# Altium PCB pcb3.pcbdoc
Units mil, origin at the board's own origin, x right, y up, seen from the top; angles counter-clockwise.
Board outline 3315 x 3159.89 mil, 2 copper layers (Top Layer, Bottom Layer); 16 components, 37 nets, 77 pads, 4 vias.
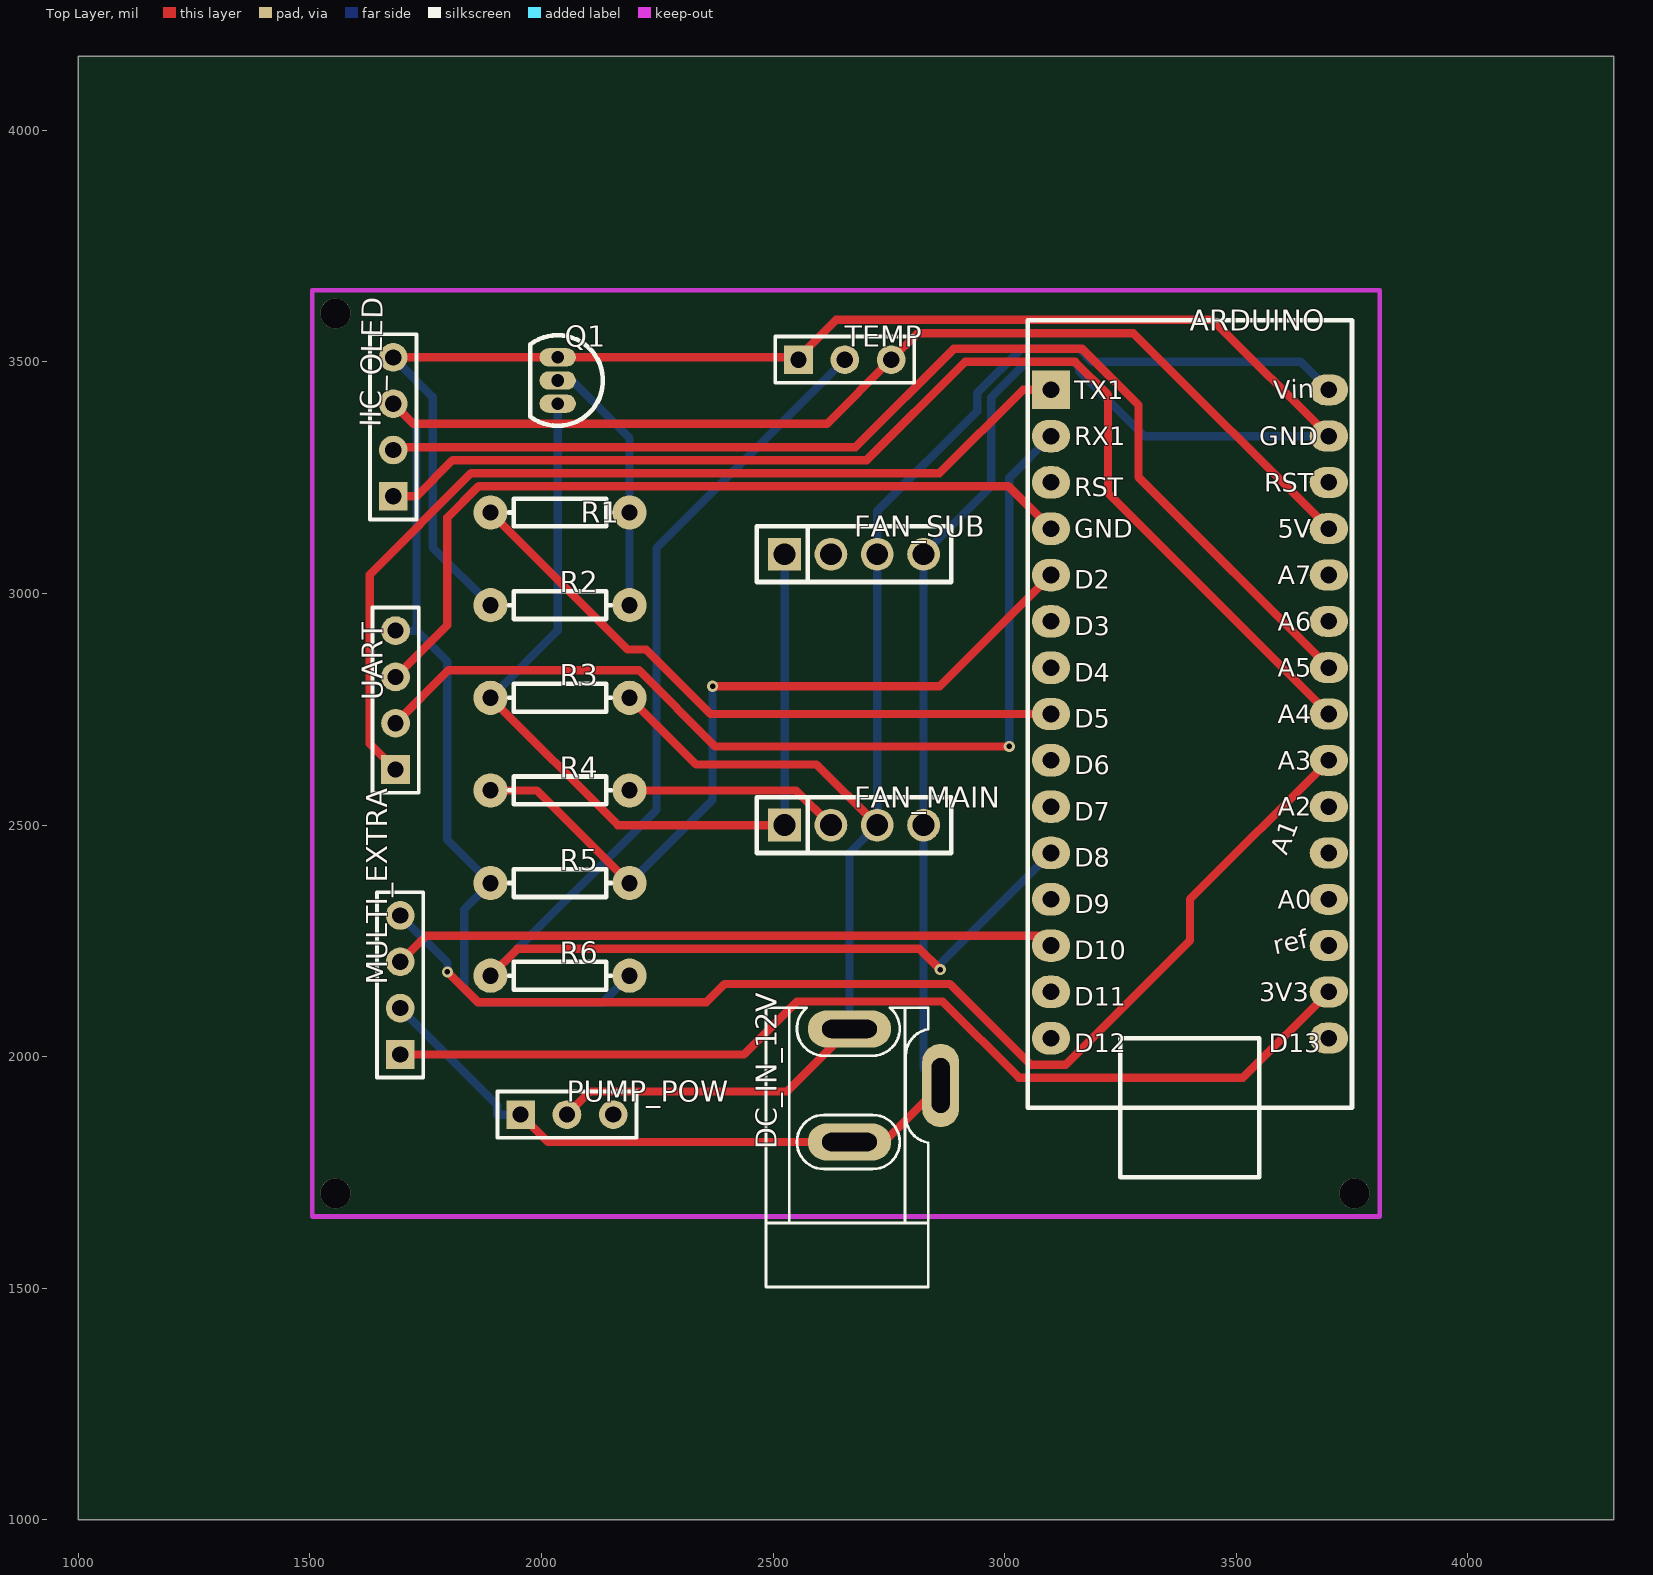
[diagram p0: Top Layer view]
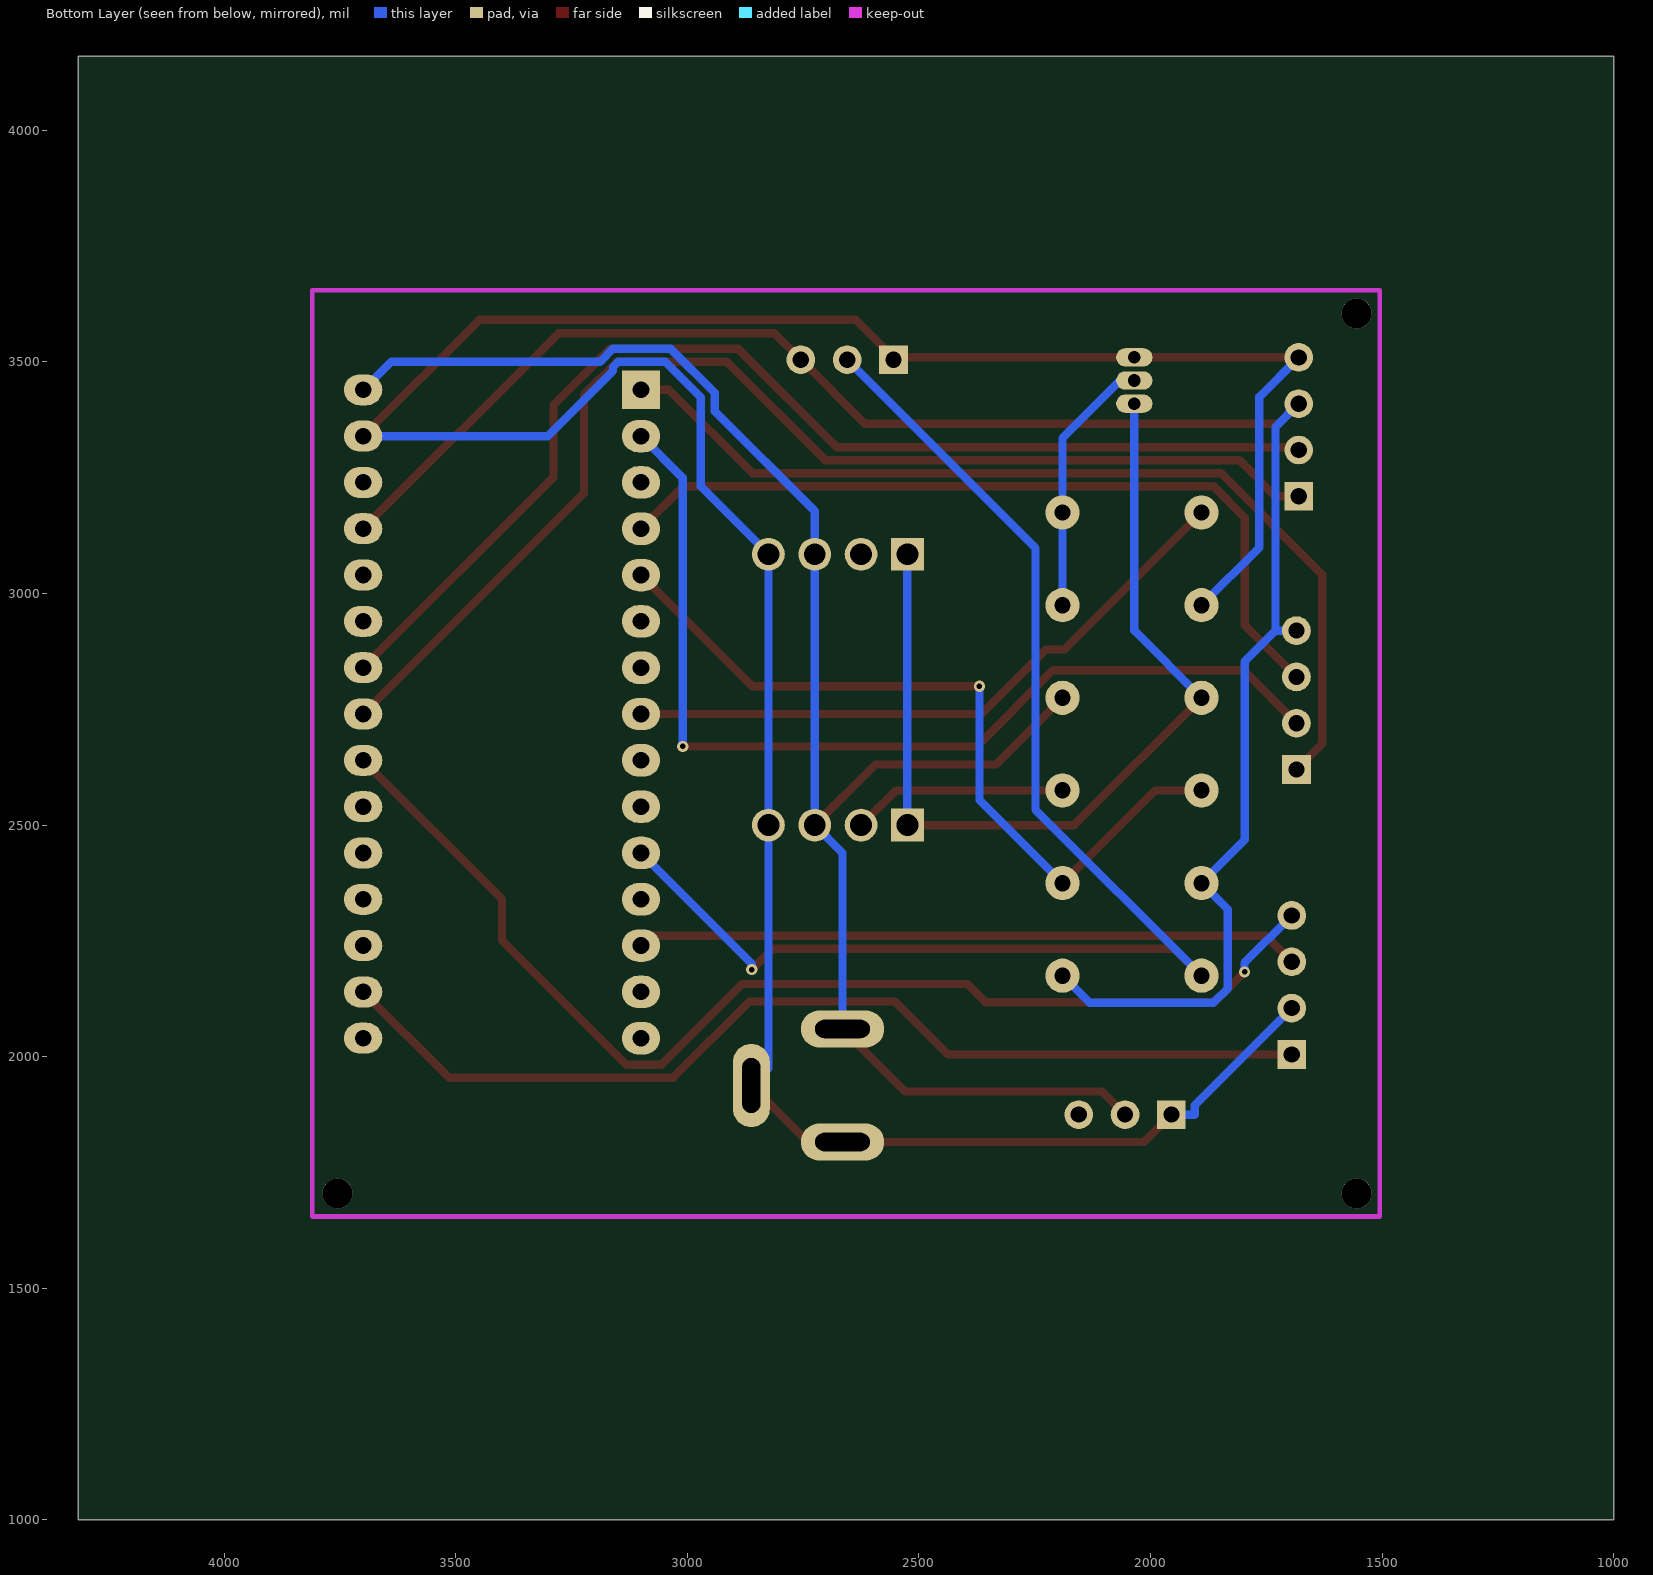
[diagram p1: Bottom Layer view, seen from below]

## Layer stack, top to bottom
Top Layer: signal copper (thickness not stored)
Dielectric: dielectric 12.6, FR-4, Dk 4.8
Bottom Layer: signal copper (thickness not stored)

## Board outline
4315,1000 1000,1000 1000,4159.89 4315,4159.89

## Components (designator, comment, footprint, x,y, rotation, side; value= is the part's Value field where it differs from the comment)
ARDUINO "ArduinoNano" "ARDUINO NANO VINCENT" 3400,2739.89 r0 top
DC_IN_12V "DC005" DC005 2665,2059.89 r90 top
FAN_MAIN "风扇2" DIP-1X4P-2.54MM-M 2675,2499.89 r0 top
FAN_SUB "风扇1" DIP-1X4P-2.54MM-M 2675,3084.89 r0 top
IIC_OLED "Header-Male-2.54_1x4_IIC" HDR-TH_4P-P2.54-V 1680,3359.89 r90 top
MULTI_EXTRA "Header-Male-2.54_1x4_EXTRA" HDR-TH_4P-P2.54-V 1695,2154.89 r90 top
PUMP_POW "Header-Male-2.54_1x3" HDR-TH_3P-P2.54-V 2055,1874.89 r0 top
Q1 "9013H" TO-92(TO-92-3) 2035,3459.89 r0 top
R1 "10k" AXIAL-0.3 2040,3174.89 r0 top
R2 "10k" AXIAL-0.3 2040,2974.89 r0 top
R3 "2.2k" AXIAL-0.3 2040,2774.89 r0 top
R4 "100Ω" AXIAL-0.3 2040,2574.89 r0 top
R5 "2k" AXIAL-0.3 2040,2374.89 r0 top
R6 "4.7k" AXIAL-0.3 2040,2174.89 r0 top
TEMP "Header-Male-2.54_1x3_TEMP" HDR-TH_3P-P2.54-V 2655,3504.89 r0 top
UART "Header-Male-2.54_1x4_UART" HDR-TH_4P-P2.54-V 1685,2769.89 r90 top

## Footprints (in the part's own frame and the unit in brackets; to place one, negate y for a bottom-side part, rotate by r counter-clockwise, add the part's x,y. Pads: shape width x height; smd on the part's side, far side on the other; paste and mask are expansions set on the pad)
"ARDUINO NANO VINCENT" [mil]
  rect 82.68x82.68 hole 36: 1(-300,700)
  oval 82.65x70 hole 36: 2(-300,600) 3(-300,500) 4(-300,400) 5(-300,300) 6(-300,200) 7(-300,100) 8(-300,0) 9(-300,-100) 10(-300,-200) 11(-300,-300) 12(-300,-400) 13(-300,-500) 14(-300,-600) 15(-300,-700)
  oval 82.65x66.93 hole 36: 16(300,-700) 17(300,-600) 18(300,-500) 19(300,-400) 20(300,-300) 21(300,-200) 22(300,-100) 23(300,0) 24(300,100) 25(300,200) 26(300,300) 27(300,400) 28(300,500) 29(300,600) 30(300,700)
  silkscreen extent -350,-1000 350,850
AXIAL-0.3 [mil]
  round 74 hole 35.4: 1(-150,0) 2(150,0)
  silkscreen extent -110,-30 110,30
DC005 [mil]
  oval 80x179.98 hole 39.38 slot 118.11 at 90 deg: 1(0,0) 2(-244.09,0)
  oval 179.98x80 hole 39.38 slot 118.11 at 0 deg: 3(-122.05,-196.85)
  silkscreen extent -557,-170 46,180
DIP-1X4P-2.54MM-M [mm]
  rect 1.8x1.8 hole 1.2: 1(-3.81,0)
  round 1.8 hole 1.2: 2(-1.27,0) 3(1.27,0) 4(3.81,0)
  silkscreen extent -5.33,-1.52 5.33,1.52
HDR-TH_3P-P2.54-V [mil]
  rect 62x62 hole 35: 1(-100,0)
  round 62 hole 35: 2(0,0) 3(100,0)
  silkscreen extent -150,-50 150,50
HDR-TH_4P-P2.54-V [mil]
  rect 62x62 hole 35: 1(-150,0)
  round 62 hole 35: 2(-50,0) 3(50,0) 4(150,0)
  silkscreen extent -200,-50 200,50
TO-92(TO-92-3) [mm]
  oval 1.999x1 hole 0.7: 1(0,1.27) 2(0,0) 3(0,-1.27)
  silkscreen extent -1.5,-2.48 2.48,2.48

## Free pads (board coordinates)
  round 65 hole 65 unplated: ""(1555,1704.89) ""(1555,3604.89) ""(3755,1704.89)

## Via types
v1: diameter 24, hole 12, Top Layer to Bottom Layer, 4 vias

## Nets (pads, with @x,y where several pads share a name; then routed paths per layer and width w, separated by ;. In a path a pad name is that pad's centre, name@x,y a point inside that pad or via, vN(x,y) a via of type N, cw(c..) or ccw(c..) an arc to the next point about the centre after c; other vN are vias at no path point)
GND: ARDUINO.29 DC_IN_12V.2 DC_IN_12V.3 FAN_MAIN.4 FAN_SUB.4 IIC_OLED.4 MULTI_EXTRA.2 PUMP_POW.1 Q1.1 R2.1 TEMP.1 | length 6527.1
  Top Layer w18: IIC_OLED.4 Q1.1 TEMP.1@2555,3509.89 ; PUMP_POW.1 2014.1,1815.79 DC_IN_12V.2 2739.8,1815.79 DC_IN_12V.3@2861.9,1937.79 ; TEMP.1 TEMP.1@2555,3509.89 ; ARDUINO.29 3449.1,3590.79 2635.9,3590.79 TEMP.1@2555,3509.89
  Bottom Layer w18: IIC_OLED.4 1765.1,3424.79 1765.1,3099.79 R2.1 ; MULTI_EXTRA.2 1904.9,1894.99 1904.9,1874.89 PUMP_POW.1 ; DC_IN_12V.3@2861.9,1937.79 2825,1974.69 FAN_MAIN.4 FAN_SUB.4 2971,3230.89 2971,3423.69 3047.7,3500.29 3149.3,3500.29 3160.4,3489.09 3160.4,3480.69 3301.2,3339.89 ARDUINO.29
H1_2: FAN_SUB.2
H4_3: PUMP_POW.3
Q1_2: Q1.2 R1.2 R2.2 | length 567.1
  Bottom Layer w18: Q1.2 2065.6,3459.89 2190,3335.49 R1.2 R2.2
Q1_3: FAN_MAIN.1 FAN_SUB.1 Q1.3 R3.1 | length 2029
  Top Layer w18: R3.1 2165,2499.89 FAN_MAIN.1
  Bottom Layer w18: R3.1 2035,2919.89 Q1.3 ; FAN_MAIN.1 FAN_SUB.1
R1_1: ARDUINO.8 R1.1 | length 1390.2
  Top Layer w18: R1.1 2185.9,2878.99 2225.7,2878.99 2364.8,2739.89 ARDUINO.8
R4_1: ARDUINO.5 R4.1 R5.2 | length 1712
  Top Layer w18: R4.1 1990,2574.89 R5.2 ; v1(2369.4,2799.69) 2859.8,2799.69 ARDUINO.5
  Bottom Layer w18: R5.2 2369.4,2554.29 v1(2369.4,2799.69)
R4_2: FAN_MAIN.2 R4.2 | length 466.1
  Top Layer w18: R4.2 2550,2574.89 FAN_MAIN.2
R5_1: ARDUINO.27 IIC_OLED.3 R5.1 R6.2 TEMP.3 UART.4 | length 4105.6
  Top Layer w18: IIC_OLED.3 1723.7,3366.19 2616.4,3366.19 TEMP.3 2811.7,3561.59 3278.3,3561.59 ARDUINO.27
  Bottom Layer w18: IIC_OLED.3 1730.1,3359.79 1730.1,2919.99 1730,2919.89 ; UART.4 1730,2919.89 ; R6.2 2131.8,2116.69 1864,2116.69 1833,2147.59 1833,2317.89 R5.1 1796.8,2468.09 1796.8,2853.09 1730,2919.89
S$15: 
S$17: 
U2_1: ARDUINO.1 UART.1 | length 2079.9
  Top Layer w18: UART.1 1629.5,2675.39 1629.5,3041.09 1848.2,3259.79 2859.5,3259.79 3039.6,3439.89 ARDUINO.1
U2_2: ARDUINO.2 UART.2 | length 2147.8
  Top Layer w18: UART.2 1799.5,2834.39 2210.6,2834.39 2375.1,2669.89 v1(3010,2669.89)
  Bottom Layer w18: v1(3010,2669.89) 3010,3249.89 ARDUINO.2
U2_3: ARDUINO.3
U2_4: ARDUINO.4 UART.3 | length 1759.7
  Top Layer w18: UART.3 1796.8,2931.69 1796.8,3164.19 1864.3,3231.59 3008.3,3231.59 ARDUINO.4
U2_6: ARDUINO.6
U2_7: ARDUINO.7
U2_9: ARDUINO.9
U2_10: ARDUINO.10
U2_11: ARDUINO.11 R6.1 TEMP.2 | length 3011.4
  Top Layer w18: R6.1 1948,2232.89 2816.1,2232.89 v1(2861,2187.99)
  Bottom Layer w18: R6.1 2248.2,2533.09 2248.2,3098.09 TEMP.2 ; v1(2861,2187.99) 2861.1,2187.99 2861.1,2200.89 ARDUINO.11
U2_12: ARDUINO.12
U2_13: ARDUINO.13 MULTI_EXTRA.3 | length 1437
  Top Layer w18: MULTI_EXTRA.3 1751.1,2260.99 3078.9,2260.99 ARDUINO.13
U2_14: ARDUINO.14
U2_15: ARDUINO.15
U2_16: ARDUINO.16
U2_17: ARDUINO.17 MULTI_EXTRA.1 | length 2197.3
  Top Layer w18: MULTI_EXTRA.1 2437.2,2004.89 2551.5,2119.19 2866.3,2119.19 3030.8,1954.59 3514.7,1954.59 ARDUINO.17
U2_18: ARDUINO.18
U2_19: ARDUINO.19
U2_20: ARDUINO.20
U2_21: ARDUINO.21
U2_22: ARDUINO.22 MULTI_EXTRA.4 | length 2507.2
  Top Layer w18: v1(1797,2182.99) 1862.4,2117.69 2356.2,2117.69 2395.4,2156.89 2881.8,2156.89 3055.9,1982.69 3132.3,1982.69 3400.3,2250.79 3400.3,2340.19 ARDUINO.22
  Bottom Layer w18: MULTI_EXTRA.4 1797,2202.89 v1(1797,2182.99)
U2_23: ARDUINO.23 IIC_OLED.1 | length 2579.7
  Top Layer w18: IIC_OLED.1 1730.1,3209.89 1808.1,3287.89 2702.3,3287.89 2914.8,3500.29 3152.1,3500.29 3223.2,3429.29 3223.2,3216.69 ARDUINO.23
U2_24: ARDUINO.24 IIC_OLED.2 | length 2487.2
  Top Layer w18: IIC_OLED.2 1686.2,3315.99 2677.9,3315.99 2890.4,3528.49 3167.5,3528.49 3288.9,3407.09 3288.9,3250.99 ARDUINO.24
U2_25: ARDUINO.25
U2_26: ARDUINO.26
U2_28: ARDUINO.28
VCC: ARDUINO.30 DC_IN_12V.1 FAN_MAIN.3 FAN_SUB.3 PUMP_POW.2 R3.2 | length 3658.6
  Top Layer w18: PUMP_POW.2 2105.1,1924.99 2530.1,1924.99 DC_IN_12V.1 ; R3.2 2333.9,2630.99 2593.9,2630.99 FAN_MAIN.3
  Bottom Layer w18: DC_IN_12V.1 2665,2439.89 FAN_MAIN.3 FAN_SUB.3 2725,3177.69 2941.2,3393.89 2941.2,3433.59 3036,3528.49 3160.9,3528.49 3188.6,3500.29 3639.6,3500.29 ARDUINO.30

## Silkscreen, mask and mechanical layers (free items; w line width, h text height)
Document:
  lines w0.1: 2656.5,2578.95 2658.5,2580.95

## Text inside footprints (layer, text, board x,y; h text height)
ARDUINO: Top Overlay "TX1" at 3150,3419.89 h40; Top Overlay "GND" at 3550,3319.89 h40; Top Overlay "5V" at 3590,3119.89 h40; Top Overlay "D12" at 3150,2009.89 h40; Top Overlay "Vin" at 3580.7,3419.9 h40 r2; Top Overlay "D13" at 3570,2009.89 h40; Top Overlay "GND" at 3150,3119.89 h40; Top Overlay "RX1" at 3150,3319.89 h40; Top Overlay "RST" at 3150,3209.89 h40; Top Overlay "D2" at 3150,3009.89 h40; Top Overlay "D3" at 3150,2909.89 h40; Top Overlay "D4" at 3150,2809.89 h40; Top Overlay "D5" at 3150,2709.89 h40; Top Overlay "D6" at 3150,2609.89 h40; Top Overlay "D7" at 3150,2509.89 h40; Top Overlay "D8" at 3150,2409.89 h40; Top Overlay "D9" at 3150,2309.89 h40; Top Overlay "D10" at 3150,2209.89 h40; Top Overlay "D11" at 3150,2109.89 h40; Top Overlay "3V3" at 3550,2119.89 h40; Top Overlay "ref" at 3584.16,2220.33 h40 r12; Top Overlay "A0" at 3590,2319.89 h40; Top Overlay "A1" at 3608.67,2432.72 h40 r69; Top Overlay "A2" at 3590,2519.89 h40; Top Overlay "A3" at 3590,2619.89 h40; Top Overlay "A4" at 3590,2719.89 h40; Top Overlay "A5" at 3590,2819.89 h40; Top Overlay "A6" at 3590,2919.89 h40; Top Overlay "A7" at 3590,3019.89 h40; Top Overlay "RST" at 3560,3219.89 h40